# Altium PCB CNC Controller.PcbDoc
Units mm, origin at the board's own origin, x right, y up, seen from the top; angles counter-clockwise.
Board outline 129 x 112 mm, 2 copper layers (Top Layer, Bottom Layer); 90 components, 85 nets, 292 pads, 11 vias.
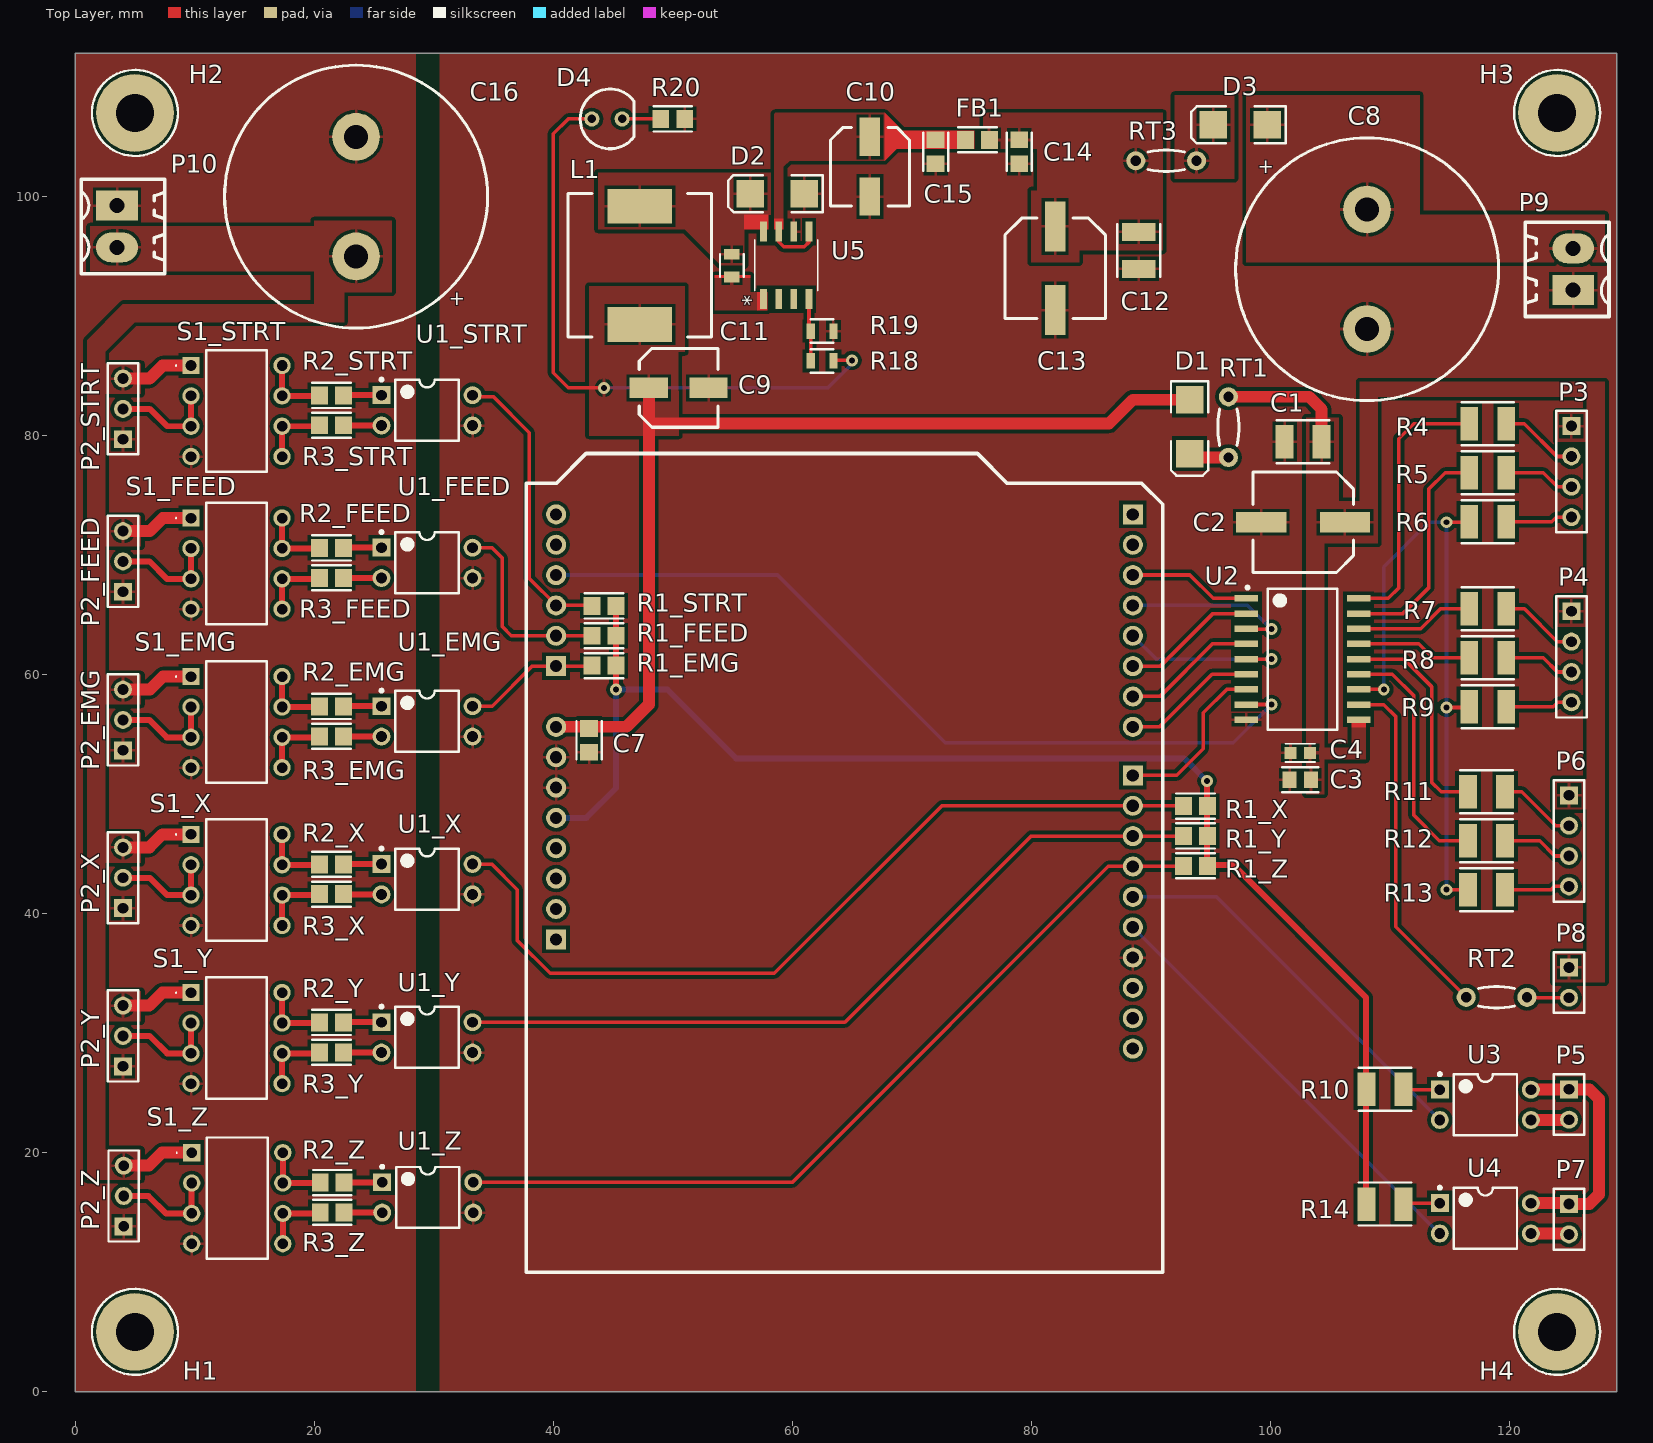
[diagram p0: Top Layer view]
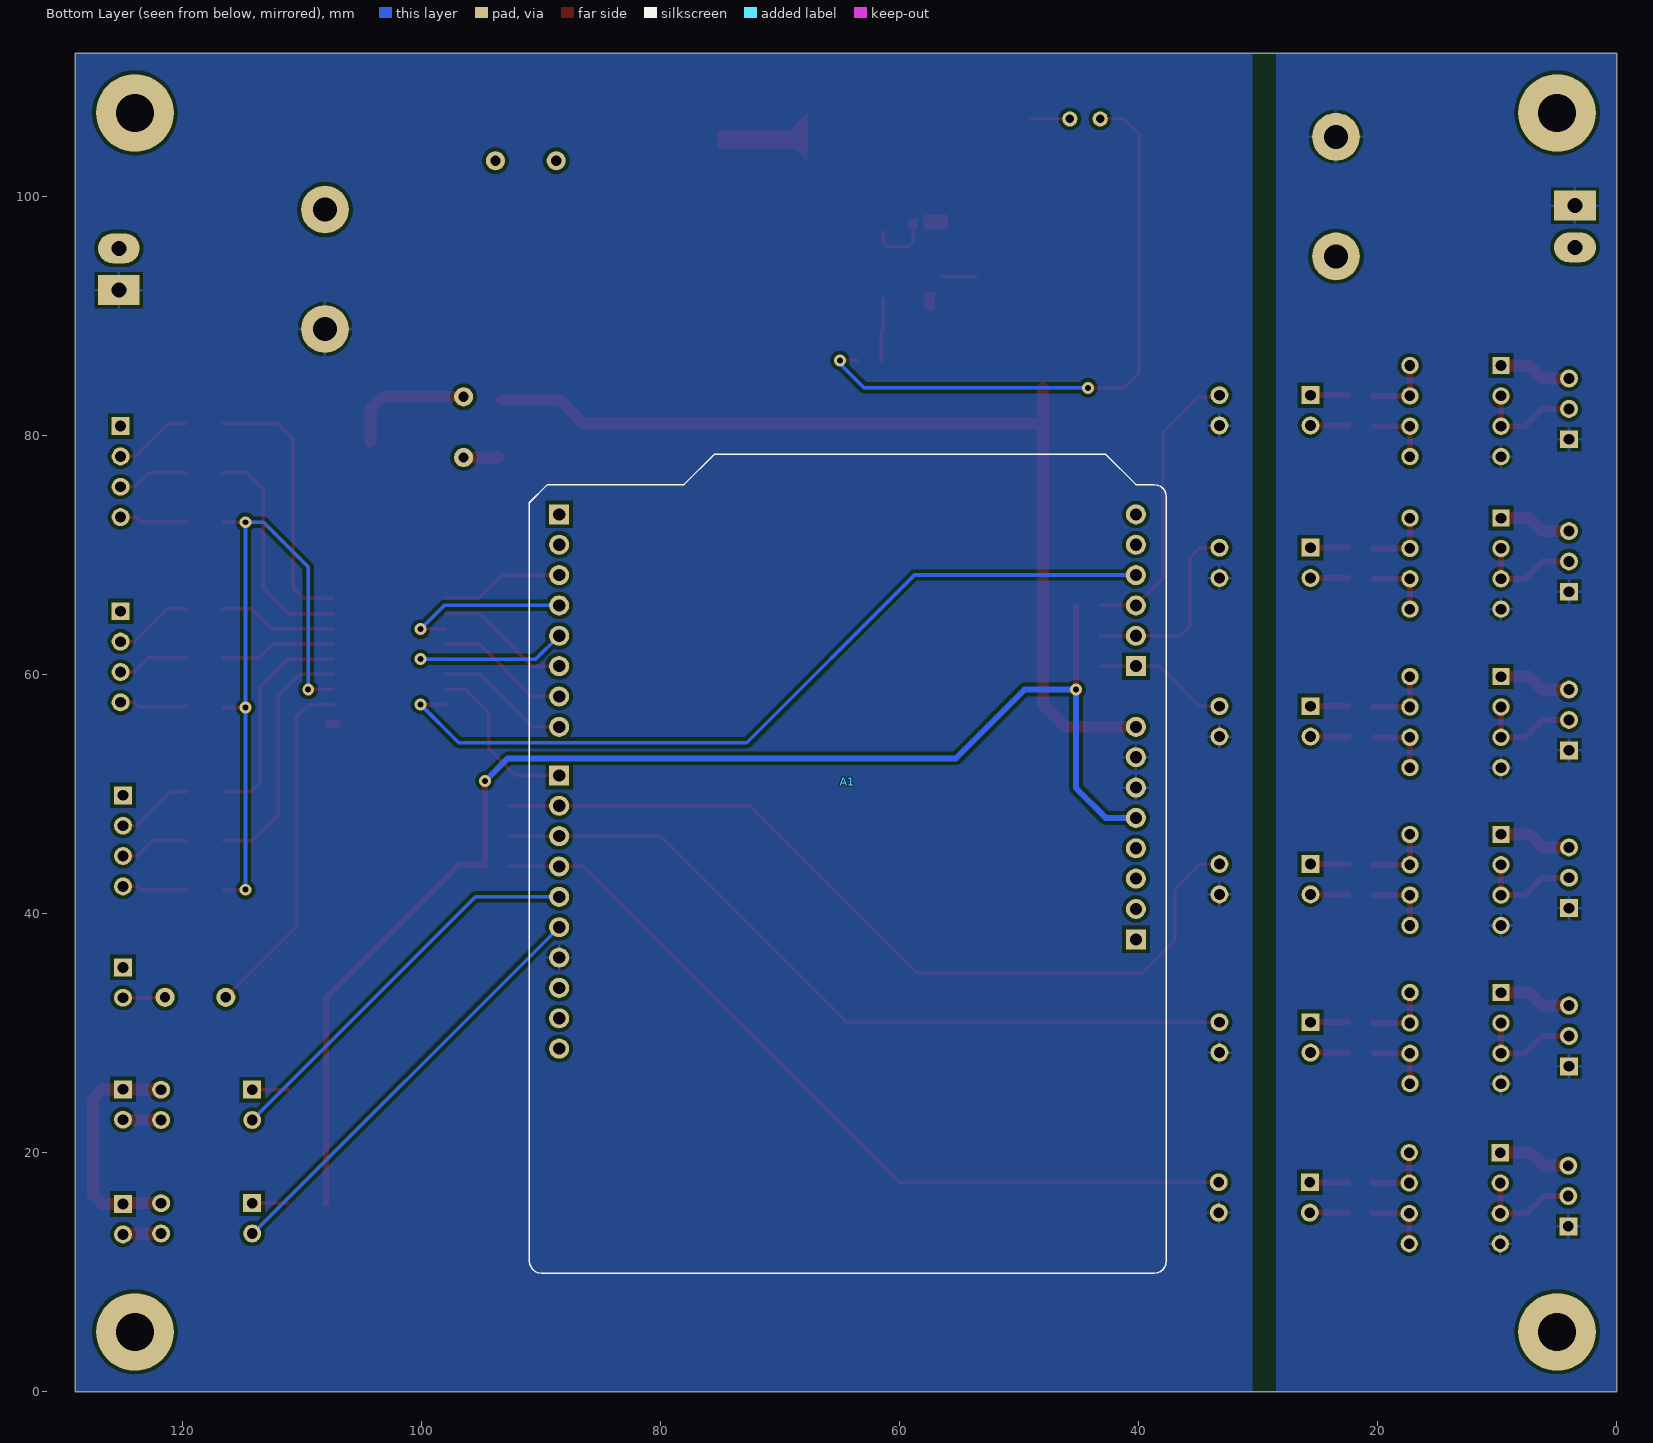
[diagram p1: Bottom Layer view, seen from below]

## Layer stack, top to bottom
Top Solder: solder mask 0.0102, Solder Resist, Dk 3.5
Top Layer: signal copper 0.0356
Dielectric 1: dielectric 0.32, FR-4, Dk 4.8
Bottom Layer: signal copper 0.0356
Bottom Solder: solder mask 0.0102, Solder Resist, Dk 3.5

## Board outline
0,0 129,0 129,112 0,112

## Design rules (kind name [scope] priority, off if disabled: settings)
Clearance [All] p1: gap=0.3
HoleSize [All] p1: absolutevalues=TRUE maxlimit=5 minlimit=0.2 maxpercent=80.000 minpercent=20.000
HoleToHoleClearance [All] p1: gap=0.3 allowstackedmicrovias=TRUE
MinimumAnnularRing [All] p1: minimumring=0.25
PlaneClearance [All] p1: clearance=0.5
PolygonConnect [All] p1: connectstyle=Relief reliefconductorwidth=0.254 reliefentries=4 polygonreliefangle="90 Angle" airgapwidth=0.254
RoomDefinition Z_LIMIT [InComponentClass('Z_LIMIT')] p1: confinementstyle=ConfineOut formatcopy=TRUE lockcomponents=FALSE outline 190.75,23.25 232.5,23.25 232.5,36.75 190.75,36.75
RoomDefinition Y_LIMIT [InComponentClass('Y_LIMIT')] p2: confinementstyle=ConfineOut formatcopy=TRUE lockcomponents=FALSE outline 190.75,38.75 232.5,38.75 232.5,52.25 190.75,52.25
RoomDefinition X_LIMIT [InComponentClass('X_LIMIT')] p3: confinementstyle=ConfineOut formatcopy=TRUE lockcomponents=FALSE outline 190.75,54.25 232.5,54.25 232.5,67.75 190.75,67.75
RoomDefinition SUPPLY [InComponentClass('SUPPLY')] p4: confinementstyle=ConfineOut formatcopy=TRUE lockcomponents=FALSE outline 249.5,-43.264 297.203,-43.264 297.203,-30.25 249.5,-30.25
RoomDefinition START_RESUME [InComponentClass('START_RESUME')] p5: confinementstyle=ConfineOut formatcopy=TRUE lockcomponents=FALSE outline 190.5,-20.75 232.25,-20.75 232.25,-7.25 190.5,-7.25
RoomDefinition SHIELD [InComponentClass('SHIELD')] p6: confinementstyle=ConfineOut formatcopy=TRUE lockcomponents=FALSE outline 245.5,-17.25 283.5,-17.25 283.5,9.982 245.5,9.982
RoomDefinition "Motor Driver" [InComponentClass('Motor Driver')] p7: confinementstyle=ConfineOut formatcopy=TRUE lockcomponents=FALSE outline 186.5,-43.25 242.544,-43.25 242.544,-22.612 186.5,-22.612
RoomDefinition FEED_HOLD [InComponentClass('FEED_HOLD')] p8: confinementstyle=ConfineOut formatcopy=TRUE lockcomponents=FALSE outline 190.75,-6.25 232.5,-6.25 232.5,7.25 190.75,7.25
RoomDefinition EMERGENCY [InComponentClass('EMERGENCY')] p9: confinementstyle=ConfineOut formatcopy=TRUE lockcomponents=FALSE outline 190.5,8.75 232.25,8.75 232.25,22.25 190.5,22.25
RoutingVias [All] p1: holewidth=0.5 width=1 viastyle="Through Hole" minholewidth=0.3 minwidth=0.45 maxholewidth=3 maxwidth=4
SilkToSilkClearance [All] p1: silktosilkclearance=0.2
SilkToSolderMaskClearance [IsPad] p1: minsilkscreentomaskgap=0.15 clearancetoexposedcopper=TRUE
SolderMaskExpansion [All] p1: expansion=0.102
Width [All] p1: maxlimit=5 minlimit=0.2 preferedwidth=0.3
24 further rules are at their usual default settings.

## Classes and differential pairs
channel class Input: EMERGENCY FEED_HOLD START_RESUME X_LIMIT Y_LIMIT Z_LIMIT
component class Z_LIMIT: P2_Z R1_Z R2_Z R3_Z S1_Z U1_Z
component class Y_LIMIT: P2_Y R1_Y R2_Y R3_Y S1_Y U1_Y
component class X_LIMIT: P2_X R1_X R2_X R3_X S1_X U1_X
component class SUPPLY: C8 C9 C10 C11 C12 C13 C14 C15 C16 D2 D3 D4 FB1 L1 P9 P10 R18 R19 R20 RT3 U5
component class START_RESUME: R1_STRT R2_STRT R3_STRT S1_STRT START U1_STRT
component class SHIELD: A1 C7 H1 H2 H3 H4
component class "Motor Driver": C1 C2 C3 C4 D1 P3 P4 P5 P6 P7 P8 R4 R5 R6 R7 R8 R9 R10 R11 R12 R13 R14 RT1 RT2 U2 U3 U4
component class FEED_HOLD: P2_FEED R1_FEED R2_FEED R3_FEED S1_FEED U1_FEED
component class EMERGENCY: P2_EMG R1_EMG R2_EMG R3_EMG S1_EMG U1_EMG

## Components (designator, comment, footprint, x,y, rotation, side; value= is the part's Value field where it differs from the comment)
A1 "ARDUINO_UNO_REV3" ARDUINO_ARDUINO_UNO_REV3 64.35,44.175 r90 bottom
C1 "X7R/1210/50V" SMT1210_M 102.75,79.5 r90 top
C2 "8x10.2" "FKV Panasonic 8x10.2L (F)" 102.75,72.75 r90 top
C3 "X7R/0805/50V" SMT0805_N 102.514,51.196 r270 top
C4 "X7R/0603/50V" SMT0603_N 102.514,53.446 r90 top
C7 "Capacitor" SMT0805_M 43,54.5 r0 top
C8 "Cap Pol2" CAP_P10MM-D22MM 108.1,93.92 r0 top
C9 "Cap Pol2" "FKV Panasonic 6.3x7.7L (D8)" 50.5,84 r270 top
C10 "Cap Pol2" "FKV Panasonic 6.3x7.7L (D8)" 66.5,102.5 r180 top
C11 "Capacitor" SMD_CAP_0805 54.95,94.23 r0 top
C12 "X7R/1210/50V" SMT1210_M 89,95.5 r180 top
C13 "8x10.2" "FKV Panasonic 8x10.2L (F)" 82,94 r180 top
C14 "Capacitor" SMT0805_M 79,103.75 r0 top
C15 "Capacitor" SMT0805_M 72,103.75 r0 top
C16 "Cap Pol2" CAP_P10MM-D22MM 23.5,100 r180 top
D1 "B340A-13-F" SMB 93.25,80.75 r270 top
D2 "B340A-13-F" SMB 58.75,100.25 r180 top
D3 "B340A-13-F" SMB 97.5,106 r180 top
D4 "LED" LED-3mm 44.5,106.5 r270 top
FB1 "60R@100MHz" SMT0805_M 75.5,104.75 r90 top
H1 "Hole" "Hole 3.2mm x 6.5mm" 5,5 r0 top
H2 "Hole" "Hole 3.2mm x 6.5mm" 5,107 r0 top
H3 "Hole" "Hole 3.2mm x 6.5mm" 124,107 r0 top
H4 "Hole" "Hole 3.2mm x 6.5mm" 124,5 r0 top
L1 "Inductor" "IND MSS1278 COILCRAFT" 47.25,94.25 r180 top
P2_EMG "Header 3" HDR1X3 4,53.668 r90 top (schematic designator P2)
P2_FEED "Header 3" HDR1X3 4,66.932 r90 top (schematic designator P2)
P2_STRT "Header 3" HDR1X3 4,79.696 r90 top (schematic designator P2)
P2_X "Header 3" HDR1X3 4,40.46 r90 top (schematic designator P2)
P2_Y "Header 3" HDR1X3 4,27.224 r90 top (schematic designator P2)
P2_Z "Header 3" HDR1X3 4.057,13.832 r90 top (schematic designator P2)
P3 "" HDR1X4 125.2,80.8 r270 top
P4 "" HDR1X4 125.2,65.3 r270 top
P5 "Header 2" HDR1X2 125,25.3 r270 top
P6 "" HDR1X4 125,49.9 r270 top
P7 "Header 2" HDR1X2 125,15.7 r270 top
P8 "Header 2" HDR1X2 125,35.5 r270 top
P9 "ECH350V-02P" ECH350V-02P 125.35,93.92 r90 top
P10 "ECH350V-02P" ECH350V-02P 3.5,97.5 r270 top
R1_EMG "0805/.125W/5Q" SMT0805_M 44.25,60.75 r270 top (schematic designator R1)
R1_FEED "0805/.125W/5Q" SMT0805_M 44.25,63.25 r270 top (schematic designator R1)
R1_STRT "0805/.125W/5Q" SMT0805_M 44.25,65.75 r270 top (schematic designator R1)
R1_X "0805/.125W/5Q" SMT0805_M 93.75,49 r270 top (schematic designator R1)
R1_Y "0805/.125W/5Q" SMT0805_M 93.75,46.5 r270 top (schematic designator R1)
R1_Z "0805/.125W/5Q" SMT0805_M 93.75,44 r270 top (schematic designator R1)
R2_EMG "0805/.125W/5Q" SMT0805_M 21.443,57.336 r270 top (schematic designator R2)
R2_FEED "0805/.125W/5Q" SMT0805_M 21.443,70.6 r270 top (schematic designator R2)
R2_STRT "0805/.125W/5Q" SMT0805_M 21.443,83.364 r270 top (schematic designator R2)
R2_X "0805/.125W/5Q" SMT0805_M 21.443,44.128 r270 top (schematic designator R2)
R2_Y "0805/.125W/5Q" SMT0805_M 21.443,30.892 r270 top (schematic designator R2)
R2_Z "0805/.125W/5Q" SMT0805_M 21.5,17.5 r270 top (schematic designator R2)
R3_EMG "0805/.125W/5Q" SMT0805_M 21.443,54.836 r270 top (schematic designator R3)
R3_FEED "0805/.125W/5Q" SMT0805_M 21.443,68.1 r270 top (schematic designator R3)
R3_STRT "0805/.125W/5Q" SMT0805_M 21.443,80.864 r270 top (schematic designator R3)
R3_X "0805/.125W/5Q" SMT0805_M 21.443,41.628 r270 top (schematic designator R3)
R3_Y "0805/.125W/5Q" SMT0805_M 21.443,28.392 r270 top (schematic designator R3)
R3_Z "0805/.125W/5Q" SMT0805_M 21.5,15 r270 top (schematic designator R3)
R4 "1210/.5W/1Q" SMT1210_M 118.2,81 r90 top
R5 "1210/.5W/1Q" SMT1210_M 118.2,76.9 r90 top
R6 "1210/.5W/1Q" SMT1210_M 118.2,72.8 r90 top
R7 "1210/.5W/1Q" SMT1210_M 118.2,65.5 r90 top
R8 "1210/.5W/1Q" SMT1210_M 118.2,61.4 r90 top
R9 "1210/.5W/1Q" SMT1210_M 118.2,57.3 r90 top
R10 "1210/.5W/1Q" SMT1210_M 109.6,25.3 r90 top
R11 "1210/.5W/1Q" SMT1210_M 118.1,50.2 r90 top
R12 "1210/.5W/1Q" SMT1210_M 118.1,46.1 r90 top
R13 "1210/.5W/1Q" SMT1210_M 118.1,42 r90 top
R14 "1210/.5W/1Q" SMT1210_M 109.6,15.7 r90 top
R18 "Res" SMD_RES_0805 62.5,86.25 r90 top
R19 "Res" SMD_RES_0805 62.5,88.75 r270 top
R20 "Res" SMT0805_M 50,106.5 r90 top
RT1 "Itrip=0.6A" AXIAL-0.2 96.5,83.25 r270 top
RT2 "Poly Switch" AXIAL-0.2 116.4,33 r0 top
RT3 "Itrip=0.6A" AXIAL-0.2 88.75,103 r0 top
S1_EMG "DipSwitch 4P" DS-04 9.693,59.836 r270 top (schematic designator S1)
S1_FEED "DipSwitch 4P" DS-04 9.693,73.1 r270 top (schematic designator S1)
S1_STRT "DipSwitch 4P" DS-04 9.693,85.864 r270 top (schematic designator S1)
S1_X "DipSwitch 4P" DS-04 9.693,46.628 r270 top (schematic designator S1)
S1_Y "DipSwitch 4P" DS-04 9.693,33.392 r270 top (schematic designator S1)
S1_Z "DipSwitch 4P" DS-04 9.75,20 r270 top (schematic designator S1)
U1_EMG "PC817X" DIP-4 29.443,56.086 r0 top (schematic designator U1)
U1_FEED "PC817X" DIP-4 29.443,69.35 r0 top (schematic designator U1)
U1_STRT "PC817X" DIP-4 29.443,82.114 r0 top (schematic designator U1)
U1_X "PC817X" DIP-4 29.443,42.878 r0 top (schematic designator U1)
U1_Y "PC817X" DIP-4 29.443,29.642 r0 top (schematic designator U1)
U1_Z "PC817X" DIP-4 29.5,16.25 r0 top (schematic designator U1)
U2 "TBD62083AFWG" SOIC18 102.7,61.3 r0 top
U3 "PC817X" DIP-4 118,24 r0 top
U4 "PC817X" DIP-4 118,14.5 r0 top
U5 "LM2675" SOIC-8-M 59.5,94.25 r90 top

## Footprints (in the part's own frame and the unit in brackets; to place one, negate y for a bottom-side part, rotate by r counter-clockwise, add the part's x,y. Pads: shape width x height; smd on the part's side, far side on the other; paste and mask are expansions set on the pad)
ARDUINO_ARDUINO_UNO_REV3 [mil]
  round 66 hole 40: 3V3(50.89,-949.19) 5V(150.89,-949.19) A1(750.89,-949.19) A2(850.89,-949.19) A3(950.89,-949.19) A4(1050.89,-949.19) A4_SDA(-509.11,950.82) A5(1150.89,-949.19) A5_SCL(-609.11,950.82) AREF(-409.11,950.82) D1(1050.89,950.82) D2(950.89,950.82) D3(850.89,950.82) D4(750.89,950.82) D5(650.89,950.82) D6(550.89,950.82) D7(450.89,950.82) D9(190.89,950.82) D10(90.89,950.82) D11(-9.11,950.82) D12(-109.11,950.82) D13(-209.11,950.82) GND_1(350.89,-949.19) GND_2(250.89,-949.19) GND_3(-309.11,950.82) IOREF(-149.11,-949.19) RST(-49.11,-949.19) VIN(450.89,-949.19)
  rect 66x66 / inner round 66 / far side rect 66x66 hole 40: A0(650.89,-949.19) D0(1150.89,950.82) D8(290.89,950.82) P1(-249.11,-949.19)
  silkscreen extent -1349,-1049 1349,1049
AXIAL-0.2 [mm] "Axial Device, Thru-Hole; 2 Leads; 0.2 in Pin Spacing"
  round 1.6 hole 0.85: 1(0,0) 2(5.08,0)
  silkscreen extent 1.02,-0.89 4.06,0.89, body extent -0.8,-1.02 5.88,1.02, height 1.52
CAP_P10MM-D22MM [mm]
  round 4 hole 2: 1(0,5) 2(0,-5)
  silkscreen extent -11,-11 11,11, body extent -11.01,-11.01 11.01,11.01
DIP-4 [mm] "DIP; 4 Leads; Row Spacing 7.62 mm; Pitch 2.54 mm"
  rect 1.5x1.5 hole 0.9: 1(-3.81,1.27)
  round 1.5 hole 0.9: 2(-3.81,-1.27) 3(3.81,-1.27) 4(3.81,1.27)
  silkscreen extent -3.93,-2.55 2.65,2.69, body extent -3.15,-2.5 3.15,2.5, height 5.6
DS-04 [mm]
  rect 1.446x1.446 hole 0.89: 1(0,0)
  round 1.446 hole 0.89: 2(2.54,0) 3(5.08,0) 4(7.62,0) 5(7.62,7.62) 6(5.08,7.62) 7(2.54,7.62) 8(0,7.62)
  silkscreen extent -1.27,-1.3 8.89,6.35, body extent -2.26,-0.36 9.88,7.98, height 5
ECH350V-02P [mm]
  rect 2.5x3.5 hole 1.25: 1(-1.75,0)
  oval 2.5x3.5 hole 1.25: 2(1.75,0)
  silkscreen extent -3.95,-3 3.95,4, body extent -3.9,-3 3.9,4.2, height 9.21
"FKV Panasonic 6.3x7.7L (D8)" [mm]
  rect 1.7x3.2 smd: 1(0,-2.5) 2(0,2.5)
  silkscreen extent -3.3,-3.3 3.3,3.3, body extent -3.43,-3.43 3.43,3.43
"FKV Panasonic 8x10.2L (F)" [mm]
  rect 1.7x4.2 smd: 1(0,-3.5) 2(0,3.5)
  silkscreen extent -4.2,-4.2 4.2,4.2, body extent -4.33,-4.33 4.33,4.33
HDR1X2 [mm] "Connector; Header; 2 Position"
  rect 1.5x1.5 hole 0.9: 1(0,0)
  round 1.5 hole 0.9: 2(2.54,0)
  silkscreen extent -1.27,-1.27 3.81,1.27
HDR1X3 [mm] "Connector; Header; 3 Position"
  rect 1.5x1.5 hole 0.9: 1(0,0)
  round 1.5 hole 0.9: 2(2.54,0) 3(5.08,0)
  silkscreen extent -1.27,-1.27 6.35,1.27
HDR1X4 [mm] "Connector; Header; 4 Position"
  rect 1.5x1.5 hole 0.9: 1(0,0)
  round 1.5 hole 0.9: 2(2.54,0) 3(5.08,0) 4(7.62,0)
  silkscreen extent -1.27,-1.27 8.89,1.27
"Hole 3.2mm x 6.5mm" [mm]
  round 6.5 hole 3.2: 1(0,0)
  silkscreen extent -3.6,-3.6 3.6,3.6
"IND MSS1278 COILCRAFT" [mm] "IHLP"
  rect 5.4x2.9 smd: 1(0,-4.95) 2(0,4.95)
  silkscreen extent -6,-6 6,6
LED-3mm [mil]
  round 50 hole 28: 1(0,-50) 2(0,50)
  silkscreen extent -98,-88 98,89, body extent -97,-87 97,88
SMB [mm] "DO-214-AA/SMB; 2 C-Bend Leads; Body 5.3 x 3.6 mm, inc. leads (LxW)"
  rect 2.3x2.3 smd: 1(-2.25,0) 2(2.25,0)
  silkscreen extent -3.8,-1.55 4.1,1.55
SMD_CAP_0805 [mm] "Capacitor SMD 0805 EB"
  rect 1.3x0.9 smd: 1(0,-0.95) 2(0,0.95)
  silkscreen extent -0.99,-0.95 0.99,0.95, body extent -0.7,-1.07 0.7,1.08, height 0.7
SMD_RES_0805 [mm] "Resistor SMD 0805 EB"
  rect 1.3x0.7 smd: 1(0,-0.95) 2(0,0.95)
  silkscreen extent -0.99,-0.95 0.99,0.95, body extent -0.7,-1.07 0.7,1.08, height 0.7
SMT0603_N [mm] "SMT 00603 Medium-Density"
  rect 1x1 smd: 1(0,0.82) 2(0,-0.82)
  silkscreen extent -0.76,-1.25 0.76,1.25, body extent -0.4,-0.85 0.4,0.85, height 0.56
SMT0805_M [mm] "SMT 0805 Low-Density"
  rect 1.5x1.4 smd: 1(0,-1) 2(0,1)
  silkscreen extent -1.05,-1.6 1.05,1.6, body extent -0.7,-1.07 0.7,1.07, height 0.7
SMT0805_N [mm] "SMT 0805 Medium-Density"
  rect 1.4x1.2 smd: 1(0,-0.9) 2(0,0.9)
  silkscreen extent -1.05,-1.5 1.05,1.5, body extent -0.7,-1.07 0.7,1.08, height 0.7
SMT1210_M [mm] "SMT 1210 Low-Density"
  rect 2.8x1.5 smd: 1(0,1.55) 2(0,-1.55)
  silkscreen extent -1.8,-2.2 1.8,2.2, body extent -1.35,-1.7 1.35,1.7, height 1.5
SOIC18 [mil] "SOIC, 18-Leads, Body 11.6x7.5mm, Pitch 1.27mm, IPC Low Density"
  rect 76.77x21.65 smd: 1(-185,200) 2(-185,150) 3(-185,100) 4(-185,50) 5(-185,0) 6(-185,-50) 7(-185,-100) 8(-185,-150) 9(-185,-200) 10(185,-200) 11(185,-150) 12(185,-100) 13(185,-50) 14(185,0) 15(185,50) 16(185,100) 17(185,150) 18(185,200)
  silkscreen extent -186,-232 114,240, body extent -203,-228 203,226, height 104
SOIC-8-M [mil]
  rect 65.5x22 smd paste+0 mask+0: 1(-111.25,75) 2(-111.25,25) 3(-111.25,-25) 4(-111.25,-75) 5(111.25,-75) 6(111.25,-25) 7(111.25,25) 8(111.25,75)
  silkscreen extent -84,-104 84,104, body extent -122,-99 122,99, height 69

## Part data
A1: "Microcontroller board based on the ATmega328P."
C1 C3 C4 C12: library part Cap, "Capacitor"
C2 C13: library part "Cap Pol1", "Polarized Capacitor (Radial)"
C8 C9 C10 C16: "Polarized Capacitor (Axial)"
D1 D2 D3: library part "D Schottky", "Schottky Diode"
D4: "Typical INFRARED GaAs LED"
FB1: library part "Ferrite Bead"
P2_EMG P2_FEED P2_STRT P2_X P2_Y P2_Z: "Header, 3-Pin"
P3 P4 P6: library part "Header 4", "Header, 4-Pin"
P5 P7 P8: "Header, 2-Pin"
R1_EMG R1_FEED R1_STRT R1_X R1_Y R1_Z R2_EMG R2_FEED R2_STRT R2_X R2_Y R2_Z R3_EMG R3_FEED R3_STRT R3_X R3_Y R3_Z R4 R5 R6 R7 R8 R9 R10 R11 R12 R13 R14: library part Res1, "Resistor"
R18 R19 R20: "Resistor"
RT1 RT3: library part "Poly Switch", "Thermistor"
RT2: "Thermistor"
S1_EMG S1_FEED S1_STRT S1_X S1_Y S1_Z: library part DS-04
U2: library part ULN2803LW, "High-Voltage, High-Current Darlington Array"
U5: "SIMPLE SWITCHER&reg; 6.5V to 40V, 1A Low Component Count Step-Down Regulator 8-SOIC -40 to 125"

## Via types
v1: diameter 1, hole 0.5, Top Layer to Bottom Layer, 11 vias

## Nets (pads, with @x,y where several pads share a name; then routed paths per layer and width w, separated by ;. In a path a pad name is that pad's centre, name@x,y a point inside that pad or via, vN(x,y) a via of type N, cw(c..) or ccw(c..) an arc to the next point about the centre after c; other vN are vias at no path point)
5V_MCU: A1.5V R1_EMG.2 R1_FEED.2 R1_STRT.2 R1_X.2 R1_Y.2 R1_Z.2 R10.1 R14.1 | length 116.1
  Top Layer w0.5: v1(45.25,58.75) R1_STRT.2 ; v1(94.7,51.1) 94.7,44.05 96.95,44.05 108,33 R14.1@108,15.75
  Bottom Layer w0.5: A1.5V@40.248,48.016 42.766,48.016 45.25,50.5 v1(45.25,58.75) 49.55,58.75 55.3,53 92.8,53 v1(94.7,51.1)
24V_AUX: C12.2 C13.1 C14.2 FB1.1 RT3.1
24V_SEN: C16.1 P2_EMG.3 P2_FEED.3 P2_STRT.3 P2_X.3 P2_Y.3 P2_Z.3 P10.2 S1_EMG.1 S1_FEED.1 S1_STRT.1 S1_X.1 S1_Y.1 S1_Z.1 | length 36.9
  Top Layer w1: P2_Y.3 6.196,32.304 7.284,33.392 S1_Y.1 ; P2_X.3 6.21,45.54 7.298,46.628 S1_X.1 ; P2_EMG.3 6.248,58.748 7.336,59.836 S1_EMG.1 ; P2_FEED.3 6.238,72.012 7.326,73.1 S1_FEED.1 ; P2_STRT.3 6.224,84.776 7.312,85.864 S1_STRT.1 ; P2_Z.3 6.162,18.912 7.25,20 S1_Z.1
+12V_AUX: A1.VIN C7.2 C9.1 D1.1 D4.1 L1.2 R18.1 | length 133.1
  Top Layer w0.3: D4.1 41.25,106.5 40,105.25 40,85.25 41.25,84 v1(44.25,84) ; R18.1@63.5,86.3 v1(65,86.3) v1@65,86.1
  Top Layer w1: A1.VIN@40.248,55.636 46.136,55.636 48,57.5 48,81 ; C9.1 48,81 ; D1.1 88.5,83 86.5,81 48,81
  Bottom Layer w0.3: v1(44.25,84) 63,84 v1@65,86 ; v1@65,86.1 v1(65,86.3)
+24V_INV: P5.1 P7.1 U3.4 U4.4 | length 20
  Top Layer w1: U4.4 P7.1@124.93,15.77 ; U3.4 126.73,25.27 127.5,24.5 127.5,16.5 126.7,15.7 P7.1
BUCK_CB: C11.1 U5.1
BUCK_FB: R18.2 R19.1 U5.4 | length 5
  Top Layer w0.3: R19.1@61.405,88.895 U5.4 ; R18.2 R19.1
BUCK_IN: C10.1 C15.2 FB1.2 U5.5 U5.7 | length 4.6
  Top Layer w0.3: U5.7 58.865,96.235 59.3,95.8 59.663,95.8 59.669,95.794 60.994,95.794 61.405,96.205 U5.5
BUCK_SW: C11.2 D2.2 L1.1 U5.8
COOLANT_EN_OUT: RT2.1 U2.11 | length 29.5
  Top Layer w0.3: U2.11 109.51,57.49 110.5,56.5 110.5,38.9 RT2.1
DIR_X_OUT: R5.1 U2.17 | length 19
  Top Layer w0.3: U2.17 111.11,65.11 113.25,67.25 113.25,75.5 114.65,76.9 R5.1
DIR_Y_OUT: R8.1 U2.15 | length 9.7
  Top Layer w0.3: U2.15 112.43,62.57 113.6,61.4 R8.1
DIR_Z_OUT: R12.1 U2.13 | length 20.8
  Top Layer w0.3: U2.13 110.22,60.03 112,58.25 112,48.25 114.15,46.1 R12.1
DO_CPU_COOLANT_EN: A1.A3 U2.8 | length 69.1
  Top Layer w0.3: U2.8@98.011,57.5 v1(100.1,57.5)
  Bottom Layer w0.3: A1.A3@40.248,68.336 58.764,68.336 72.8,54.3 96.9,54.3 v1(100.1,57.5)
DO_CPU_DIR_X: A1.D5 U2.2 | length 11.3
  Top Layer w0.3: A1.D5@88.508,60.716 90.816,60.716 95.21,65.11 U2.2
DO_CPU_DIR_Y: A1.D6 U2.4 | length 11.3
  Top Layer w0.3: A1.D6@88.508,58.176 90.776,58.176 95.17,62.57 U2.4
DO_CPU_DIR_Z: A1.D7 U2.6 | length 11.3
  Top Layer w0.3: A1.D7@88.508,55.636 90.736,55.636 95.13,60.03 U2.6
DO_CPU_SPINDLE_DIR: A1.D13 U4.2 | length 36.3
  Bottom Layer w0.3: A1.D13@88.508,38.872 U4.2@114.15,13.23
DO_CPU_SPINDLE_EN: A1.D12 U3.2 | length 33.4
  Bottom Layer w0.3: A1.D12@88.508,41.412 95.508,41.412 U3.2
DO_CPU_STEP_X: A1.D2 U2.1 | length 10.3
  Top Layer w0.3: A1.D2@88.508,68.336 93.264,68.336 95.22,66.38 U2.1
DO_CPU_STEP_Y: A1.D3 U2.3 | length 14.5
  Top Layer w0.3: U2.3@98.041,63.8 v1(100.1,63.8)
  Bottom Layer w0.3: A1.D3@88.508,65.796 98.104,65.796 v1(100.1,63.8)
DO_CPU_STEP_Z: A1.D4 U2.5 | length 14.5
  Top Layer w0.3: U2.5 v1(100.1,61.3)
  Bottom Layer w0.3: A1.D4@88.508,63.256 90.464,61.3 v1(100.1,61.3)
DO_CPU_STEPPER_EN: A1.D8 U2.7 | length 14.2
  Top Layer w0.3: A1.D8@88.508,51.572 92.172,51.572 94.4,53.8 94.4,56.8 96.36,58.76 U2.7
EMERGENCY: A1.A0 R1_EMG.1 U1_EMG.4 | length 11.4
  Top Layer w0.3: U1_EMG.4 34.894,57.356 38.254,60.716 40.248,60.716 R1_EMG.1@43.216,60.716
FEED_HOLD: A1.A1 R1_FEED.1 U1_FEED.4 | length 16.4
  Top Layer w0.3: U1_FEED.4 34.88,70.62 35.75,69.75 35.75,64 36.494,63.256 40.248,63.256 R1_FEED.1@43.244,63.256
GND: A1.GND_1 A1.GND_2 A1.GND_3 C1.1 C2.2 C3.1 C4.1 C7.1 C8.2 C9.2 C10.2 C12.1 C13.2 C14.1 C15.1 D2.1 P9.1 R19.2 R20.1 U1_EMG.3 U1_FEED.3 U1_STRT.3 U1_X.3 U1_Y.3 U1_Z.3 U2.9 U5.6
GND_SEN: C16.2 P2_EMG.1 P2_FEED.1 P2_STRT.1 P2_X.1 P2_Y.1 P2_Z.1 P10.1 S1_EMG.4 S1_FEED.4 S1_STRT.4 S1_X.4 S1_Y.4 S1_Z.4
LIMIT_X: A1.D9 R1_X.1 U1_X.4 | length 71.6
  Top Layer w0.3: U1_X.4 34.852,44.148 37,42 37,37.75 39.75,35 58.5,35 72.532,49.032 88.508,49.032 R1_X.1@92.718,49.032
LIMIT_Y: A1.D10 R1_Y.1 U1_Y.4 | length 65.9
  Top Layer w0.3: U1_Y.4 64.412,30.912 79.992,46.492 88.508,46.492 R1_Y.1@92.742,46.492
LIMIT_Z: A1.D11 R1_Z.1 U1_Z.4 | length 70.3
  Top Layer w0.3: U1_Z.4 60.02,17.52 86.452,43.952 88.508,43.952 R1_Z.1@92.702,43.952
NetD1_2: D1.2 RT1.2 | length 2.9
  Top Layer w1: D1.2@93.58,78.17 RT1.2
NetD3_2: D3.2 RT3.2
NetD4_2: D4.2 R20.2 | length 3.2
  Top Layer w0.3: D4.2 R20.2
NetP2_EMERGENCY_2: P2_EMG.2 S1_EMG.2 S1_EMG.3 | length 8.8
  Top Layer w0.5: P2_EMG.2 6.208,56.208 7.66,54.756 S1_EMG.3 S1_EMG.2
NetP2_FEED_HOLD_2: P2_FEED.2 S1_FEED.2 S1_FEED.3 | length 8.8
  Top Layer w0.5: P2_FEED.2 6.222,69.472 7.674,68.02 S1_FEED.3 S1_FEED.2
NetP2_START_RESUME_2: P2_STRT.2 S1_STRT.2 S1_STRT.3 | length 8.8
  Top Layer w0.5: P2_STRT.2 6.236,82.236 7.688,80.784 S1_STRT.3 S1_STRT.2
NetP2_X_LIMIT_2: P2_X.2 S1_X.2 S1_X.3 | length 8.8
  Top Layer w0.5: P2_X.2 6.25,43 7.702,41.548 S1_X.3 S1_X.2
NetP2_Y_LIMIT_2: P2_Y.2 S1_Y.2 S1_Y.3 | length 8.8
  Top Layer w0.5: P2_Y.2 6.236,29.764 7.688,28.312 S1_Y.3 S1_Y.2
NetP2_Z_LIMIT_2: P2_Z.2 S1_Z.2 S1_Z.3 | length 8.8
  Top Layer w0.5: P2_Z.2 6.128,16.372 7.58,14.92 S1_Z.3 S1_Z.2
NetP3_2: P3.2 R4.2 | length 6.8
  Top Layer w0.3: R4.2 121.25,81 124,78.25 125.19,78.25 P3.2 P3.2@124.99,78.26
NetP3_3: P3.3 R5.2 | length 5.9
  Top Layer w0.3: R5.2 122.85,76.9 124.03,75.72 P3.3
NetP3_4: P3.4 R6.2 | length 5.6
  Top Layer w0.3: R6.2 123.55,72.8 123.93,73.18 P3.4
NetP4_2: P4.2 R7.2 | length 6.6
  Top Layer w0.3: R7.2 121.27,65.5 124.01,62.76 P4.2
NetP4_3: P4.3 R8.2 | length 5.9
  Top Layer w0.3: R8.2 122.85,61.4 124.03,60.22 P4.3
NetP4_4: P4.4 R9.2 | length 5.6
  Top Layer w0.3: R9.2 123.69,57.3 124.07,57.68 P4.4
NetP6_2: P6.2 R11.2 | length 6.5
  Top Layer w0.3: R11.2 121.05,50.2 123.89,47.36 P6.2
NetP6_3: P6.3 R12.2 | length 5.9
  Top Layer w0.3: R12.2 122.54,46.1 123.82,44.82 P6.3
NetP6_4: P6.4 R13.2 | length 5.5
  Top Layer w0.3: R13.2 123.5,42 123.78,42.28 P6.4
NetP8_2: P8.2 RT2.2 | length 3.5
  Top Layer w0.3: RT2.2@121.52,32.96 P8.2
NetR2_EMERGENCY_1: R2_EMG.1 S1_EMG.7 S1_EMG.8 | length 5.6
  Top Layer w0.5: S1_EMG.8 S1_EMG.7 R2_EMG.1@20.403,57.296
NetR2_EMERGENCY_2: R2_EMG.2 U1_EMG.1 | length 3.2
  Top Layer w0.5: R2_EMG.2@22.463,57.356 U1_EMG.1
NetR2_FEED_HOLD_1: R2_FEED.1 S1_FEED.7 S1_FEED.8 | length 5.6
  Top Layer w0.5: S1_FEED.8 S1_FEED.7 R2_FEED.1@20.403,70.56
NetR2_FEED_HOLD_2: R2_FEED.2 U1_FEED.1 | length 3.2
  Top Layer w0.5: R2_FEED.2@22.463,70.62 U1_FEED.1
NetR2_START_RESUME_1: R2_STRT.1 S1_STRT.7 S1_STRT.8 | length 5.6
  Top Layer w0.5: S1_STRT.8 S1_STRT.7 R2_STRT.1@20.403,83.324
NetR2_START_RESUME_2: R2_STRT.2 U1_STRT.1 | length 3.2
  Top Layer w0.5: R2_STRT.2@22.463,83.384 U1_STRT.1
NetR2_X_LIMIT_1: R2_X.1 S1_X.7 S1_X.8 | length 5.6
  Top Layer w0.5: S1_X.8 S1_X.7 R2_X.1@20.403,44.088
NetR2_X_LIMIT_2: R2_X.2 U1_X.1 | length 3.2
  Top Layer w0.5: R2_X.2@22.463,44.148 U1_X.1
NetR2_Y_LIMIT_1: R2_Y.1 S1_Y.7 S1_Y.8 | length 5.6
  Top Layer w0.5: S1_Y.8 S1_Y.7 R2_Y.1@20.403,30.852
NetR2_Y_LIMIT_2: R2_Y.2 U1_Y.1 | length 3.2
  Top Layer w0.5: R2_Y.2@22.463,30.912 U1_Y.1
NetR2_Z_LIMIT_1: R2_Z.1 S1_Z.7 S1_Z.8 | length 5.6
  Top Layer w0.5: S1_Z.8 S1_Z.7 R2_Z.1@20.46,17.46
NetR2_Z_LIMIT_2: R2_Z.2 U1_Z.1 | length 3.2
  Top Layer w0.5: R2_Z.2 U1_Z.1@25.67,17.5
NetR3_EMERGENCY_1: R3_EMG.1 S1_EMG.5 S1_EMG.6 | length 5.6
  Top Layer w0.5: S1_EMG.5 S1_EMG.6 R3_EMG.1@20.363,54.756
NetR3_EMERGENCY_2: R3_EMG.2 U1_EMG.2 | length 3.2
  Top Layer w0.5: R3_EMG.2@22.463,54.816 U1_EMG.2
NetR3_FEED_HOLD_1: R3_FEED.1 S1_FEED.5 S1_FEED.6 | length 5.6
  Top Layer w0.5: S1_FEED.5 S1_FEED.6 R3_FEED.1@20.363,68.02
NetR3_FEED_HOLD_2: R3_FEED.2 U1_FEED.2 | length 3.2
  Top Layer w0.5: R3_FEED.2@22.463,68.08 U1_FEED.2
NetR3_START_RESUME_1: R3_STRT.1 S1_STRT.5 S1_STRT.6 | length 5.6
  Top Layer w0.5: S1_STRT.5 S1_STRT.6 R3_STRT.1@20.363,80.784
NetR3_START_RESUME_2: R3_STRT.2 U1_STRT.2 | length 3.2
  Top Layer w0.5: R3_STRT.2@22.463,80.844 U1_STRT.2
NetR3_X_LIMIT_1: R3_X.1 S1_X.5 S1_X.6 | length 5.6
  Top Layer w0.5: S1_X.5 S1_X.6 R3_X.1@20.363,41.548
NetR3_X_LIMIT_2: R3_X.2 U1_X.2 | length 3.2
  Top Layer w0.5: R3_X.2@22.463,41.608 U1_X.2
NetR3_Y_LIMIT_1: R3_Y.1 S1_Y.5 S1_Y.6 | length 5.6
  Top Layer w0.5: S1_Y.5 S1_Y.6 R3_Y.1@20.363,28.312
NetR3_Y_LIMIT_2: R3_Y.2 U1_Y.2 | length 3.2
  Top Layer w0.5: R3_Y.2@22.463,28.372 U1_Y.2
NetR3_Z_LIMIT_1: R3_Z.1 S1_Z.5 S1_Z.6 | length 5.6
  Top Layer w0.5: S1_Z.5 S1_Z.6 R3_Z.1@20.42,14.92
NetR3_Z_LIMIT_2: R3_Z.2 U1_Z.2 | length 3.2
  Top Layer w0.5: R3_Z.2 U1_Z.2@25.67,15
NetR10_2: R10.2 U3.1 | length 3
  Top Layer w0.3: R10.2@111.18,25.27 U3.1
NetR14_2: R14.2 U4.1 | length 3
  Top Layer w0.3: R14.2@111.22,15.77 U4.1
PROBE: A1.A5
SPINDLE_DIR_OUT: P7.2 U4.3 | length 3.1
  Top Layer w1: U4.3 P7.2@124.93,13.23
SPINDLE_EN_OUT: P5.2 U3.3 | length 3.2
  Top Layer w1: U3.3 P5.2@124.97,22.73
START_RESUME: A1.A2 R1_STRT.1 U1_STRT.4 | length 24.4
  Top Layer w0.3: U1_STRT.4 33.387,83.25 35,83.25 38,80.25 38,68.044 40.248,65.796 R1_STRT.1@43.204,65.796
STEP_X_OUT: R4.1 U2.18 | length 22.6
  Top Layer w0.3: U2.18 109.88,66.38 110.75,67.25 110.75,79.75 112,81 R4.1
STEP_Y_OUT: R7.1 U2.16 | length 9.9
  Top Layer w0.3: U2.16 112.59,63.84 114.25,65.5 R7.1
STEP_Z_OUT: R11.1 U2.14 | length 18.4
  Top Layer w0.3: U2.14 111.2,61.3 113.5,59 113.5,51 114.3,50.2 R11.1
STEPPER_EN_OUT: R6.1 R9.1 R13.1 U2.12 | length 55.4
  Top Layer w0.3: U2.12 v1@109.49,58.76 ; v1(114.75,42) R13.1 ; v1(114.75,57.25) R9.1@116.6,57.25 ; v1(114.75,72.75) R6.1@116.6,72.75
  Bottom Layer w0.3: v1(109.5,58.75) 109.5,69 113.25,72.75 v1(114.75,72.75) v1(114.75,57.25) v1(114.75,42)
VIN: C8.1 D3.1 P9.2
VMD: C1.2 C2.1 C3.2 C4.2 P3.1 P4.1 P6.1 P8.1 RT1.1 U2.10 | length 10.9
  Top Layer w1: RT1.1 103.25,83.25 104.3,82.2 C1.2
pads on no net: A1.3V3 A1.A4 A1.A4_SDA A1.A5_SCL A1.AREF A1.D0 A1.D1 A1.IOREF A1.P1 A1.RST H1.1 H2.1 H3.1 H4.1 U5.2 U5.3

## Polygon pours and split planes (outlines as drawn)
VMD on Top Layer "VMD" (solid, pour order 68): 109,74.5 109,83.25 126.5,83.25 126.5,82 128,82 128,84.5 107.5,84.5 107.5,74.5
VMD on Top Layer "VMD" (solid, pour order 66): 126.25,79.5 124,79.5 124,82 126.5,82 126.5,79.5
VMD on Top Layer "VMD" (solid, pour order 64): 126.5,64 124,64 124,66.5 126.5,66.5
VMD on Top Layer "VMD" (solid, pour order 62): 126.5,48.75 123.75,48.75 123.75,51.25 126.5,51.25
VMD on Top Layer "VMD" (solid, pour order 60): 126.5,34.25 123.75,34.25 123.75,36.75 126.5,36.75
VMD on Top Layer "VMD" (solid, pour order 58): 128,82 128,34.25 126.5,34.25 126.5,82
VMD on Top Layer "VMD" (solid, pour order 52): 103.8,53.9 106.8,53.9 106.8,55.6 108,55.6 108,52.9 103.9,52.9
VMD on Top Layer "VMD" (solid, pour order 54): 103,50 103,54.75 104.5,54.75 104.5,50
VMD on Top Layer "VMD" (solid, pour order 56): 103,71 103,54.75 104.5,54.75 104.5,71
24V_SEN on Top Layer "24V_SEN" (solid, pour order 22): 1.25,97.5 1.25,93.75 20,93.75 20,92 26.5,92 26.5,98 20,98 20,97.5
24V_SEN on Top Layer "24V_SEN" (solid, pour order 42): 1,86 1,88 4,91 7.5,91 20,91 20,92 22.5,92 22.5,89.5 5,89.5 2.5,87 2.5,86
24V_SEN on Top Layer "24V_SEN" (solid, pour order 40): 2.5,83.5 5.5,83.5 5.5,86 2.5,86
24V_SEN on Top Layer "24V_SEN" (solid, pour order 38): 2.5,70.75 5.5,70.75 5.5,73.25 2.5,73.25
24V_SEN on Top Layer "24V_SEN" (solid, pour order 36): 2.5,57.5 5.5,57.5 5.5,60 2.5,60
24V_SEN on Top Layer "24V_SEN" (solid, pour order 34): 2.5,44.25 5.5,44.25 5.5,46.75 2.5,46.75
24V_SEN on Top Layer "24V_SEN" (solid, pour order 32): 2.5,31 5.5,31 5.5,33.5 2.5,33.5
24V_SEN on Top Layer "24V_SEN" (solid, pour order 28): 2.5,17.75 5.5,17.75 5.5,20.25 2.5,20.25
24V_SEN on Top Layer "24V_SEN" (solid, pour order 24): 1,86 1,17.75 2.5,17.75 2.5,86
VMD on Top Layer "VMD" (solid, pour order 20): 109,71 109,74.5 105.75,74.5 105.75,81.5 103,81.5 103,71
+12V_AUX on Top Layer "+12V_AUX" (solid, pour order 10): 43,92.5 51,92.5 51,87 50.467,87 50.5,80.5 50.5,80 43,80
VIN on Top Layer "VIN" (solid, pour order 16): 98,108.5 112.5,108.5 112.5,98.5 128,98.5 128,94.5 98,94.5
NetD3_2 on Top Layer "NetD3_2" (solid, pour order 14): 92,101.5 97,101.5 97,108.5 92,108.5
24V_AUX on Top Layer "24V_AUX" (solid, pour order 12): 80,94.5 84,94.5 84,95.5 91,95.5 91,107 76,107 76,104 80.5,104 80.5,100.5 80,100.5
BUCK_CB on Top Layer "BUCK_CB" (solid, pour order 8): 56.5,93.4 56.5,92 57.75,92 57.75,90.5 53.5,90.5 53.5,93.4
BUCK_IN on Top Layer "BUCK_IN" (solid, remove dead copper, pour order 4): 67.737,103 67.75,103.5 67.75,107 59,107 58.5,107 58.5,97.5 59.27,97.5 59.27,102.5 59.783,103
BUCK_SW on Top Layer "BUCK_SW" (solid, pour order 6): 56,98.5 56,94.25 54,94.25 53.75,94.5 51,97.25 43.75,97.25 43.75,102 58.25,102 58.25,98.5
GND on Top Layer "GND" (solid, pour order 70): 129,112 129,0 30.5,0 30.5,112 29.5,112
GND_SEN on Top Layer "GND_SEN" (solid, pour order 44): 28.5,0 0,0 0,112 28.5,112
GND on Bottom Layer "GND" (solid, pour order 77): 129,0 30.5,0 30.5,112 129,112
GND_SEN on Bottom Layer "GND_SEN" (solid, pour order 74): 0,112 28.5,112 28.5,0 0,0

## Other copper
Top Layer:
  region net VMD: 106.8,56.2 106.8,55.6 108,55.6 108,56.2
  region net BUCK_SW: 58,97.25 56,97.25 56,98.5 58,98.5
  region net BUCK_CB: 57.062,90.5 57.9,90.5 57.9,92 57.062,92
  region net BUCK_CB: 53.5,93.4 56.5,93.4 56.5,93.2 53.5,93.2
  region net BUCK_IN: 68.75,106 69.25,105.5 68.75,105.5
  region net BUCK_IN: 67.75,107 68.75,106 68.75,105.5 67.75,105.5
  region net BUCK_IN: 67.737,103 68.737,104 67.75,104
  region net BUCK_IN: 75.25,104 75.25,105.5 67.75,105.5 67.75,104
  region net BUCK_IN: 58.5,98.162 58.5,97.25 59.25,97.25 59.27,97.27 59.27,98.162

## Silkscreen, mask and mechanical layers (free items; w line width, h text height)
Top Overlay:
  lines w0.3: 37.75,10 38,10 91,10 91,74.25 89.25,76 78,76 75.5,78.5 42.75,78.5 40.25,76 37.75,76 37.75,75.75 37.75,10
Mechanical 1:
  the board outline again, w0.3

## Text inside footprints (layer, text, board x,y; h text height)
C8: Top Overlay "+" at 98.956,101.968 h1.2
C16: Top Overlay "+" at 32.644,91.952 h1.2 r180
U5: Top Overlay "*" at 57.163,90.853 h1.27 r90; Mechanical 13 "*" at 58.344,92.32 h1.27 r90